# Altium PCB PCB1 腐蚀板.PcbDoc
Units mil, origin at the board's own origin, x right, y up, seen from the top; angles counter-clockwise.
Board outline 7956.72 x 5500 mil, 2 copper layers (Top Layer, Bottom Layer); 108 components, 11 nets, 312 pads, 24 vias.
Unrouted connection lines stored in the file: 4.
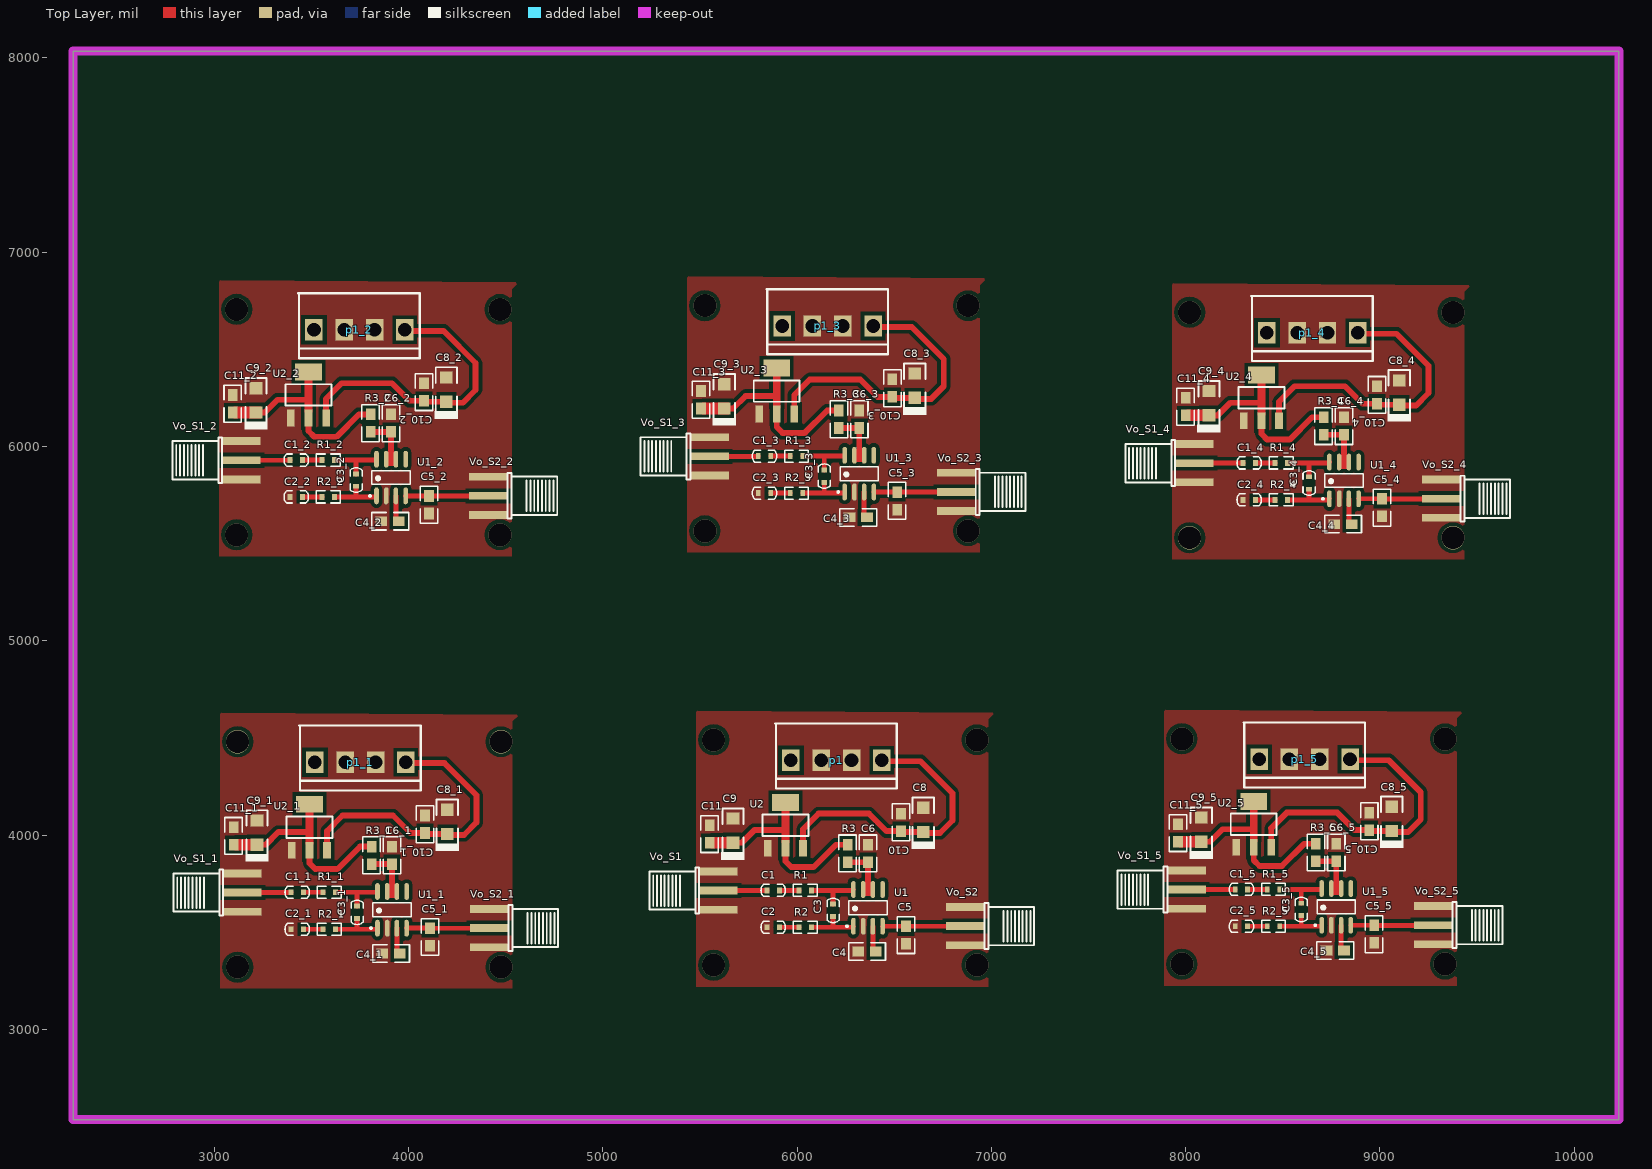
[diagram p0: Top Layer view]
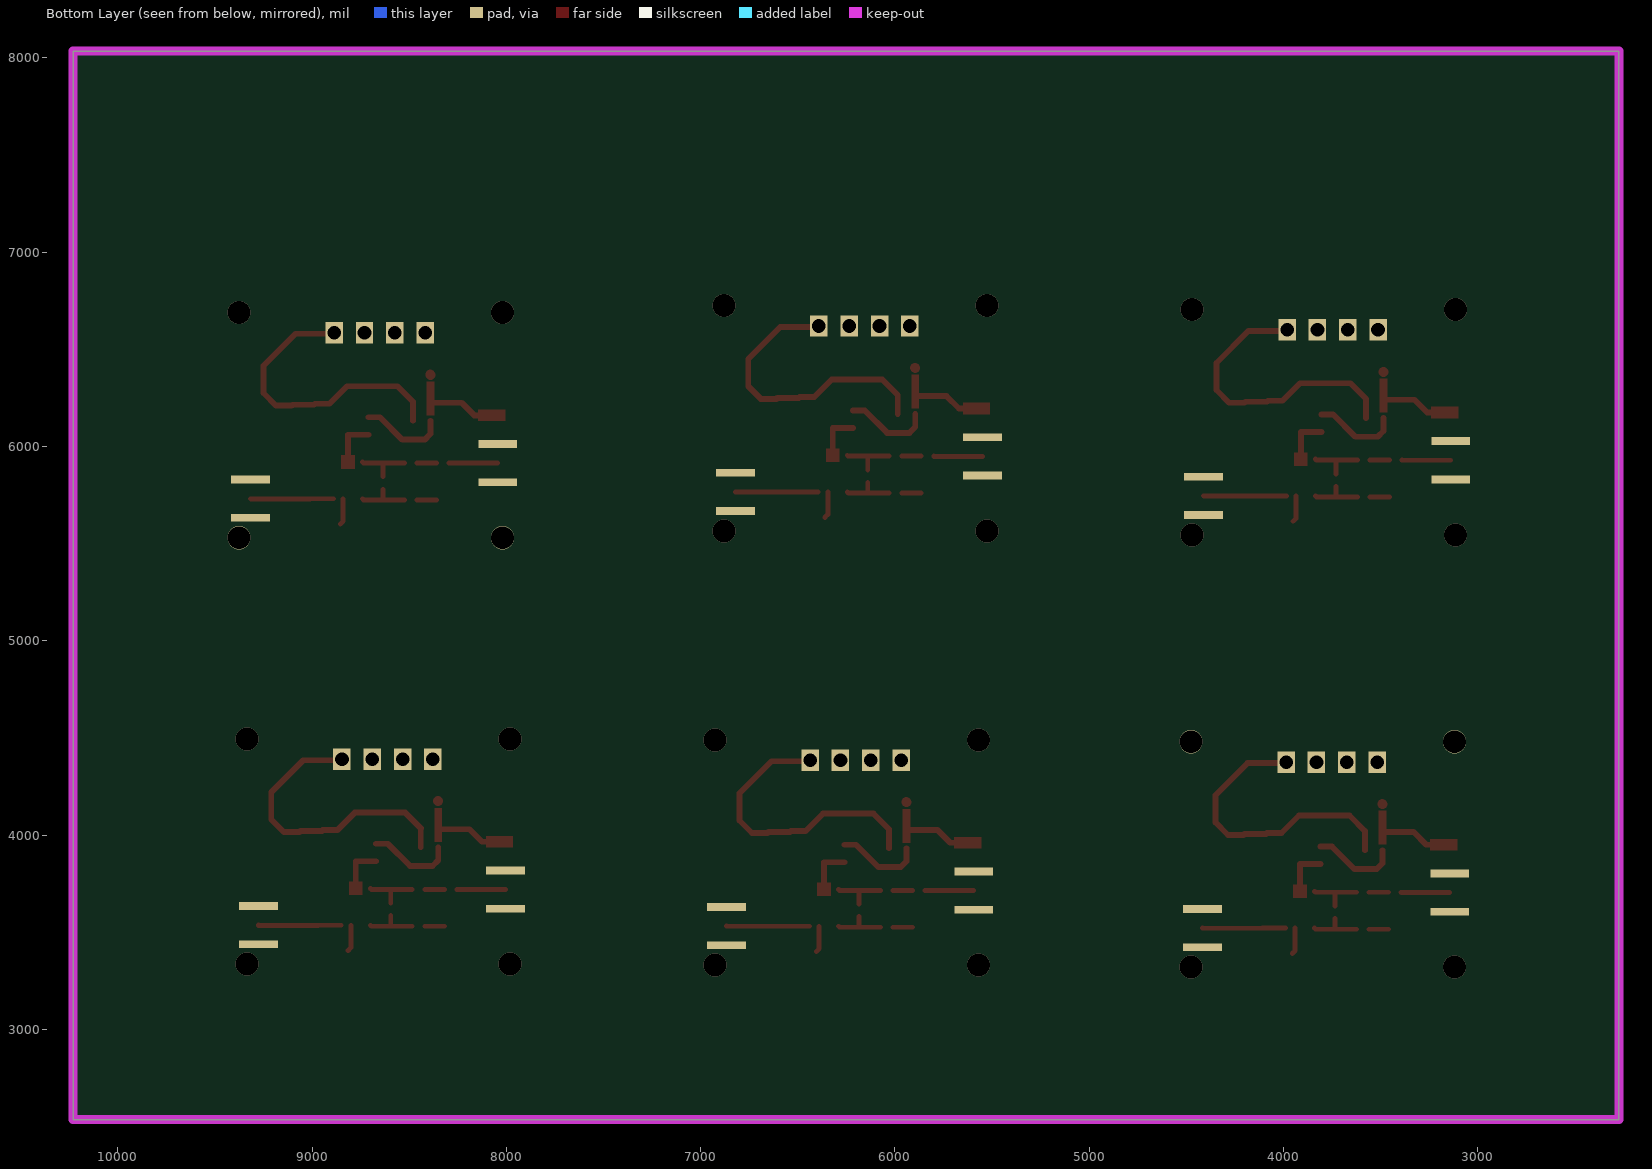
[diagram p1: Bottom Layer view, seen from below]

## Layer stack, top to bottom
Top Solder: solder mask 0.4, Solder Resist, Dk 3.5
Top Layer: signal copper 1.4
Dielectric 1: dielectric 12.6, FR-4, Dk 4.8
Bottom Layer: signal copper 1.4
Bottom Solder: solder mask 0.4, Solder Resist, Dk 3.5

## Board outline
2273.28,2535 10230,2535 10230,8035 2273.28,8035

## Design rules (kind name [scope] priority, off if disabled: settings)
Clearance [All] p1: gap=10 except(20: Arc-Fill Arc-Poly Track-Fill Track-Poly SMDPad-Fill SMDPad-Poly THPad-Fill THPad-Poly Via-Fill Via-Poly Fill-Fill Fill-Poly Poly-Poly)
PlaneConnect [All] p1: planeconnectstyle=Direct reliefexpansion=20 reliefentries=4 reliefconductorwidth=10 reliefairgap=10
PolygonConnect [All] p1: connectstyle=Direct reliefconductorwidth=10 reliefentries=4 polygonreliefangle="90 Angle" airgapwidth=10
RoutingVias [All] p1: holewidth=28 width=50 viastyle="Through Hole" minholewidth=28 minwidth=50 maxholewidth=28 maxwidth=50
SolderMaskExpansion [All] p1: expansion=4
Width [All] p1: maxlimit=100 minlimit=6 preferedwidth=10
29 further rules are at their usual default settings.

## Components (designator, comment, footprint, x,y, rotation, side; value= is the part's Value field where it differs from the comment)
C1 "0.1uf" 0603C 5845,3715 r0 top
C1_1 "0.1uf" 0603C 3395,3705 r0 top (schematic designator C1)
C1_2 "0.1uf" 0603C 3390,5930 r0 top (schematic designator C1)
C1_3 "0.1uf" 0603C 5800,5950 r0 top (schematic designator C1)
C1_4 "0.1uf" 0603C 8295,5915 r0 top (schematic designator C1)
C1_5 "0.1uf" 0603C 8255,3720 r0 top (schematic designator C1)
C2 "0.1uf" 0603C 5845,3525 r0 top
C2_1 "0.1uf" 0603C 3395,3515 r0 top (schematic designator C2)
C2_2 "0.1uf" 0603C 3390,5740 r0 top (schematic designator C2)
C2_3 "0.1uf" 0603C 5800,5760 r0 top (schematic designator C2)
C2_4 "0.1uf" 0603C 8295,5725 r0 top (schematic designator C2)
C2_5 "0.1uf" 0603C 8255,3530 r0 top (schematic designator C2)
C3 "0.1uf" 0603C 6185,3580 r90 top
C3_1 "0.1uf" 0603C 3735,3570 r90 top (schematic designator C3)
C3_2 "0.1uf" 0603C 3730,5795 r90 top (schematic designator C3)
C3_3 "0.1uf" 0603C 6140,5815 r90 top (schematic designator C3)
C3_4 "0.1uf" 0603C 8635,5780 r90 top (schematic designator C3)
C3_5 "0.1uf" 0603C 8595,3585 r90 top (schematic designator C3)
C4 "0.1uf" 0805 6405,3400 r180 top
C4_1 "0.1uf" 0805 3955,3390 r180 top (schematic designator C4)
C4_2 "0.1uf" 0805 3950,5615 r180 top (schematic designator C4)
C4_3 "0.1uf" 0805 6360,5635 r180 top (schematic designator C4)
C4_4 "0.1uf" 0805 8855,5600 r180 top (schematic designator C4)
C4_5 "0.1uf" 0805 8815,3405 r180 top (schematic designator C4)
C5 "0.1uf" 0805 6560,3530 r270 top
C5_1 "0.1uf" 0805 4110,3520 r270 top (schematic designator C5)
C5_2 "0.1uf" 0805 4105,5745 r270 top (schematic designator C5)
C5_3 "0.1uf" 0805 6515,5765 r270 top (schematic designator C5)
C5_4 "0.1uf" 0805 9010,5730 r270 top (schematic designator C5)
C5_5 "0.1uf" 0805 8970,3535 r270 top (schematic designator C5)
C6 "0.1uf" 0805 6365,3860 r90 top
C6_1 "0.1uf" 0805 3915,3850 r90 top (schematic designator C6)
C6_2 "0.1uf" 0805 3910,6075 r90 top (schematic designator C6)
C6_3 "0.1uf" 0805 6320,6095 r90 top (schematic designator C6)
C6_4 "0.1uf" 0805 8815,6060 r90 top (schematic designator C6)
C6_5 "0.1uf" 0805 8775,3865 r90 top (schematic designator C6)
C8 "Cap" 3216C-TYPE_A 6650,4015 r270 top
C8_1 "Cap" 3216C-TYPE_A 4200,4005 r270 top (schematic designator C8)
C8_2 "Cap" 3216C-TYPE_A 4195,6230 r270 top (schematic designator C8)
C8_3 "Cap" 3216C-TYPE_A 6605,6250 r270 top (schematic designator C8)
C8_4 "Cap" 3216C-TYPE_A 9100,6215 r270 top (schematic designator C8)
C8_5 "Cap" 3216C-TYPE_A 9060,4020 r270 top (schematic designator C8)
C9 "Cap" 3216C-TYPE_A 5670,3960 r270 top
C9_1 "Cap" 3216C-TYPE_A 3220,3950 r270 top (schematic designator C9)
C9_2 "Cap" 3216C-TYPE_A 3215,6175 r270 top (schematic designator C9)
C9_3 "Cap" 3216C-TYPE_A 5625,6195 r270 top (schematic designator C9)
C9_4 "Cap" 3216C-TYPE_A 8120,6160 r270 top (schematic designator C9)
C9_5 "Cap" 3216C-TYPE_A 8080,3965 r270 top (schematic designator C9)
C10 "0.1uf" 0805 6535,4110 r270 top
C10_1 "0.1uf" 0805 4085,4100 r270 top (schematic designator C10)
C10_2 "0.1uf" 0805 4080,6325 r270 top (schematic designator C10)
C10_3 "0.1uf" 0805 6490,6345 r270 top (schematic designator C10)
C10_4 "0.1uf" 0805 8985,6310 r270 top (schematic designator C10)
C10_5 "0.1uf" 0805 8945,4115 r270 top (schematic designator C10)
C11 "0.1uf" 0805 5550,4050 r270 top
C11_1 "0.1uf" 0805 3100,4040 r270 top (schematic designator C11)
C11_2 "0.1uf" 0805 3095,6265 r270 top (schematic designator C11)
C11_3 "0.1uf" 0805 5505,6285 r270 top (schematic designator C11)
C11_4 "0.1uf" 0805 8000,6250 r270 top (schematic designator C11)
C11_5 "0.1uf" 0805 7960,4055 r270 top (schematic designator C11)
p1 "VH3.96-4A" VH3.96-4P 6512.68,4239.33 r180 top
p1_1 "VH3.96-4A" VH3.96-4P 4062.68,4229.33 r180 top (schematic designator p1)
p1_2 "VH3.96-4A" VH3.96-4P 4057.68,6454.33 r180 top (schematic designator p1)
p1_3 "VH3.96-4A" VH3.96-4P 6467.68,6474.33 r180 top (schematic designator p1)
p1_4 "VH3.96-4A" VH3.96-4P 8962.68,6439.33 r180 top (schematic designator p1)
p1_5 "VH3.96-4A" VH3.96-4P 8922.68,4244.33 r180 top (schematic designator p1)
R1 "0" 0603R 6042,3715 r0 top
R1_1 "0" 0603R 3592,3705 r0 top (schematic designator R1)
R1_2 "0" 0603R 3587,5930 r0 top (schematic designator R1)
R1_3 "0" 0603R 5997,5950 r0 top (schematic designator R1)
R1_4 "0" 0603R 8492,5915 r0 top (schematic designator R1)
R1_5 "0" 0603R 8452,3720 r0 top (schematic designator R1)
R2 "0" 0603R 6042,3525 r0 top
R2_1 "0" 0603R 3592,3515 r0 top (schematic designator R2)
R2_2 "0" 0603R 3587,5740 r0 top (schematic designator R2)
R2_3 "0" 0603R 5997,5760 r0 top (schematic designator R2)
R2_4 "0" 0603R 8492,5725 r0 top (schematic designator R2)
R2_5 "0" 0603R 8452,3530 r0 top (schematic designator R2)
R3 "4R7" 0805 6260,3950 r270 top
R3_1 "4R7" 0805 3810,3940 r270 top (schematic designator R3)
R3_2 "4R7" 0805 3805,6165 r270 top (schematic designator R3)
R3_3 "4R7" 0805 6215,6185 r270 top (schematic designator R3)
R3_4 "4R7" 0805 8710,6150 r270 top (schematic designator R3)
R3_5 "4R7" 0805 8670,3955 r270 top (schematic designator R3)
U1 "AD8307ARZ" ADI-R-8_N 6365,3625 r90 top
U1_1 "AD8307ARZ" ADI-R-8_N 3915,3615 r90 top (schematic designator U1)
U1_2 "AD8307ARZ" ADI-R-8_N 3910,5840 r90 top (schematic designator U1)
U1_3 "AD8307ARZ" ADI-R-8_N 6320,5860 r90 top (schematic designator U1)
U1_4 "AD8307ARZ" ADI-R-8_N 8815,5825 r90 top (schematic designator U1)
U1_5 "AD8307ARZ" ADI-R-8_N 8775,3630 r90 top (schematic designator U1)
U2 "AMS1117-3.3V" SOT-223 5940,4050 r270 top
U2_1 "AMS1117-3.3V" SOT-223 3490,4040 r270 top (schematic designator U2)
U2_2 "AMS1117-3.3V" SOT-223 3485,6265 r270 top (schematic designator U2)
U2_3 "AMS1117-3.3V" SOT-223 5895,6285 r270 top (schematic designator U2)
U2_4 "AMS1117-3.3V" SOT-223 8390,6250 r270 top (schematic designator U2)
U2_5 "AMS1117-3.3V" SOT-223 8350,4055 r270 top (schematic designator U2)
Vo_S1 "差分输出" SMA-LYING 5535,3710 r0 top
Vo_S1_1 "差分输出" SMA-LYING 3085,3700 r0 top (schematic designator Vo_S1)
Vo_S1_2 "差分输出" SMA-LYING 3080,5925 r0 top (schematic designator Vo_S1)
Vo_S1_3 "差分输出" SMA-LYING 5490,5945 r0 top (schematic designator Vo_S1)
Vo_S1_4 "差分输出" SMA-LYING 7985,5910 r0 top (schematic designator Vo_S1)
Vo_S1_5 "差分输出" SMA-LYING 7945,3715 r0 top (schematic designator Vo_S1)
Vo_S2 "差分输出" SMA-LYING 6925,3535 r180 top
Vo_S2_1 "差分输出" SMA-LYING 4475,3525 r180 top (schematic designator Vo_S2)
Vo_S2_2 "差分输出" SMA-LYING 4470,5750 r180 top (schematic designator Vo_S2)
Vo_S2_3 "差分输出" SMA-LYING 6880,5770 r180 top (schematic designator Vo_S2)
Vo_S2_4 "差分输出" SMA-LYING 9375,5735 r180 top (schematic designator Vo_S2)
Vo_S2_5 "差分输出" SMA-LYING 9335,3540 r180 top (schematic designator Vo_S2)

## Footprints (in the part's own frame and the unit in brackets; to place one, negate y for a bottom-side part, rotate by r counter-clockwise, add the part's x,y. Pads: shape width x height; smd on the part's side, far side on the other; paste and mask are expansions set on the pad)
0603C [mil]
  rect 25x30 smd: 1(0,0) 2(64,0)
  silkscreen extent -31,-31 95,31
0603R [mil]
  rect 25x30 smd: 1(-32,0) 2(32,0)
  silkscreen extent -61,-31 61,31
0805 [mil]
  rect 60x50 smd: 1(0,0) 2(90,0)
  silkscreen extent -50,-45 140,45
3216C-TYPE_A [mm]
  rect 1.6x1.65 smd: 1(0,0) 2(-3.175,0)
  silkscreen extent -4.51,-1.54 2.22,1.52
ADI-R-8_N [mm] "SOIC, 8-Leads, Body 4.9x3.9mm, Pitch 1.27mm, IPC Medium Density"
  oval 2.2x0.6 smd: 1(-2.4,1.905) 2(-2.4,0.635) 3(-2.4,-0.635) 4(-2.4,-1.905) 5(2.4,-1.905) 6(2.4,-0.635) 7(2.4,0.635) 8(2.4,1.905)
  silkscreen extent -2.52,-2.5 0.9,2.88, body extent -2,-2.5 2,2.5, height 1.75
SMA-LYING [mm]
  rect 5.08x1.016 smd: 0(1.5,0.1) 1(1.5,-2.4) 1(1.5,2.6)
  rect 5.08x1.016 smd far side: 1(1.5,-2.4) 1(1.5,2.6)
  silkscreen extent -7.5,-2.9 -1,3.1
SOT-223 [mm]
  rect 2.2x1 smd: 1(3,-2.3) 2(3,0) 3(3,2.3)
  rect 2.2x3.5 smd: 2(-3,0)
  silkscreen extent -1.4,-3 1.4,3, body extent -3.49,-3.24 3.49,3.24, height 1.64
VH3.96-4P [mil]
  rect 90x110 hole 70: 1(76.77,-145.67) 2(232.68,-145.67) 3(388.58,-145.67) 4(544.49,-145.67)
  silkscreen extent 0,-335 625,0

## Part data
C1 C1_1 C1_2 C1_3 C1_4 C1_5 C2 C2_1 C2_2 C2_3 C2_4 C2_5 C3 C3_1 C3_2 C3_3 C3_4 C3_5 C4 C4_1 C4_2 C4_3 C4_4 C4_5 C5 C5_1 C5_2 C5_3 C5_4 C5_5 C6 C6_1 C6_2 C6_3 C6_4 C6_5 C10 C10_1 C10_2 C10_3 C10_4 C10_5 C11 C11_1 C11_2 C11_3 C11_4 C11_5: library part Cap
C8 C8_1 C8_2 C8_3 C8_4 C8_5 C9 C9_1 C9_2 C9_3 C9_4 C9_5: library part "Tantalium Cap"
R1 R1_1 R1_2 R1_3 R1_4 R1_5 R2 R2_1 R2_2 R2_3 R2_4 R2_5 R3 R3_1 R3_2 R3_3 R3_4 R3_5: library part Res
U1 U1_1 U1_2 U1_3 U1_4 U1_5: "Low Cost, DC to 500 MHz, 92 dB Logarithmic Amplifier, 400ns Response Time, R-8, Pb-Free, 98 Tube"
Vo_S1 Vo_S1_1 Vo_S1_2 Vo_S1_3 Vo_S1_4 Vo_S1_5 Vo_S2 Vo_S2_1 Vo_S2_2 Vo_S2_3 Vo_S2_4 Vo_S2_5: library part SMA

## Via types
v1: diameter 118.5, hole 118.11, Top Layer to Bottom Layer, 24 vias

## Nets (pads, with @x,y where several pads share a name; then routed paths per layer and width w, separated by ;. In a path a pad name is that pad's centre, name@x,y a point inside that pad or via, vN(x,y) a via of type N, cw(c..) or ccw(c..) an arc to the next point about the centre after c; other vN are vias at no path point)
5V: C9.1 C11.2 R3.1 U2.2 | length 731.5
  Top Layer w30: C9.1 5715,3960 5780,4025 5925,4025 ; U2.2@5940,3931.89 5940,3865 5970,3835 6085,3835 6200,3950 R3.1
  Top Layer w50: U2.2@5940,4168.11 U2.2@5941.89,4170
GND: C2.1 C4.2 C5.2 C6.2 C8.2 C9.2 C10.1 C11.1 p1.2 p1.3 U1.2 U2.1 Vo_S1.1 Vo_S2.1
NetC1_1: C1.1 Vo_S1.0 | length 251.4
  Top Layer w25: Vo_S1.0 5843.94,3713.94 C1.1
NetC1_2: C1.2 R1.1 | length 101
  Top Layer w25: C1.2 R1.1
NetC2_2: C2.2 R2.1 | length 101
  Top Layer w25: C2.2 R2.1
NetC3_1: C3.1 R2.2 U1.1 | length 275.4
  Top Layer w25: R2.2 6190,3525 ; C3.1 6185,3530 6190,3525 ; U1.1 6284.49,3525 6190,3525
NetC3_2: C3.2 R1.2 U1.8 | length 290.9
  Top Layer w25: R1.2 6190,3715 ; C3.2 6185,3710 6190,3715 ; U1.8 6285.51,3715 6190,3715
NetC4_1: C4.1 U1.3 | length 136.7
  Top Layer w25: U1.3 6390,3415 C4.1
NetC5_1: C5.1 U1.4 Vo_S2.0 | length 426.6
  Top Layer w25: U1.4 6559.49,3530.51 C5.1 6864.88,3530 Vo_S2.0
NetC6_1: C6.1 R3.2 U1.6 U1.7 | length 245
  Top Layer w30: R3.2 C6.1 6365,3720
NetC8_1: C8.1 C10.2 p1.1 U2.3 | length 1544.4
  Top Layer w30: U2.3 6030.55,4029.45 6030,4030 6110,4110 6370,4110 6460,4020 C10.2 6540,4015 C8.1 6655,4010 6735,4010 6800,4075 6800,4215 6635,4380 6455,4380 p1.1@6440,4395
pads on no net: C1_1.1 C1_1.2 C1_2.1 C1_2.2 C1_3.1 C1_3.2 C1_4.1 C1_4.2 C1_5.1 C1_5.2 C2_1.1 C2_1.2 C2_2.1 C2_2.2 C2_3.1 C2_3.2 C2_4.1 C2_4.2 C2_5.1 C2_5.2 C3_1.1 C3_1.2 C3_2.1 C3_2.2 C3_3.1 C3_3.2 C3_4.1 C3_4.2 C3_5.1 C3_5.2 C4_1.1 C4_1.2 C4_2.1 C4_2.2 C4_3.1 C4_3.2 C4_4.1 C4_4.2 C4_5.1 C4_5.2 C5_1.1 C5_1.2 C5_2.1 C5_2.2 C5_3.1 C5_3.2 C5_4.1 C5_4.2 C5_5.1 C5_5.2 C6_1.1 C6_1.2 C6_2.1 C6_2.2 C6_3.1 C6_3.2 C6_4.1 C6_4.2 C6_5.1 C6_5.2 C8_1.1 C8_1.2 C8_2.1 C8_2.2 C8_3.1 C8_3.2 C8_4.1 C8_4.2 C8_5.1 C8_5.2 C9_1.1 C9_1.2 C9_2.1 C9_2.2 C9_3.1 C9_3.2 C9_4.1 C9_4.2 C9_5.1 C9_5.2 C10_1.1 C10_1.2 C10_2.1 C10_2.2 C10_3.1 C10_3.2 C10_4.1 C10_4.2 C10_5.1 C10_5.2 C11_1.1 C11_1.2 C11_2.1 C11_2.2 C11_3.1 C11_3.2 C11_4.1 C11_4.2 C11_5.1 C11_5.2 p1.4 p1_1.1 p1_1.2 p1_1.3 p1_1.4 p1_2.1 p1_2.2 p1_2.3 p1_2.4 p1_3.1 p1_3.2 p1_3.3 p1_3.4 p1_4.1 p1_4.2 p1_4.3 p1_4.4 p1_5.1 p1_5.2 p1_5.3 p1_5.4 R1_1.1 R1_1.2 R1_2.1 R1_2.2 R1_3.1 R1_3.2 R1_4.1 R1_4.2 R1_5.1 R1_5.2 R2_1.1 R2_1.2 R2_2.1 R2_2.2 R2_3.1 R2_3.2 R2_4.1 R2_4.2 R2_5.1 R2_5.2 R3_1.1 R3_1.2 R3_2.1 R3_2.2 R3_3.1 R3_3.2 R3_4.1 R3_4.2 R3_5.1 R3_5.2 U1.5 U1_1.1 U1_1.2 U1_1.3 U1_1.4 U1_1.5 U1_1.6 U1_1.7 U1_1.8 U1_2.1 U1_2.2 U1_2.3 U1_2.4 U1_2.5 U1_2.6 U1_2.7 U1_2.8 U1_3.1 U1_3.2 U1_3.3 U1_3.4 U1_3.5 U1_3.6 U1_3.7 U1_3.8 U1_4.1 U1_4.2 U1_4.3 U1_4.4 U1_4.5 U1_4.6 U1_4.7 U1_4.8 U1_5.1 U1_5.2 U1_5.3 U1_5.4 U1_5.5 U1_5.6 U1_5.7 U1_5.8 U2_1.1 U2_1.2 U2_1.3 U2_2.1 U2_2.2 U2_2.3 U2_3.1 U2_3.2 U2_3.3 U2_4.1 U2_4.2 U2_4.3 U2_5.1 U2_5.2 U2_5.3 Vo_S1_1.0 Vo_S1_1.1 Vo_S1_2.0 Vo_S1_2.1 Vo_S1_3.0 Vo_S1_3.1 Vo_S1_4.0 Vo_S1_4.1 Vo_S1_5.0 Vo_S1_5.1 Vo_S2_1.0 Vo_S2_1.1 Vo_S2_2.0 Vo_S2_2.1 Vo_S2_3.0 Vo_S2_3.1 Vo_S2_4.0 Vo_S2_4.1 Vo_S2_5.0 Vo_S2_5.1
copper on no net: | length 20519.6
  Top Layer w25: 3139.06,5928.94 3388.94,5928.94 3390,5930 ; 3144.06,3703.94 3393.94,3703.94 3395,3705 ; 3454,5740 3555,5740 ; 3454,5930 3555,5930 ; 3459,3515 3560,3515 ; 3459,3705 3560,3705 ; 3619,5740 3735,5740 ; 3619,5930 3735,5930 ; 3624,3515 3740,3515 ; 3624,3705 3740,3705 ; 3730,5795 3730,5745 3735,5740 ; 3730,5859 3730,5925 3735,5930 ; 3735,3570 3735,3520 3740,3515 ; 3735,3634 3735,3700 3740,3705 ; 3835,5745.51 3829.49,5740 3735,5740 ; 3835,5934.49 3830.51,5930 3735,5930 ; 3840,3520.51 3834.49,3515 3740,3515 ; 3840,3709.49 3835.51,3705 3740,3705 ; 3935,5745.51 3935,5630 3950,5615 ; 3940,3520.51 3940,3405 3955,3390 ; 3985,5745.51 4104.49,5745.51 4105,5745 4409.88,5745 4410.94,5746.06 ; 3990,3520.51 4109.49,3520.51 4110,3520 4414.88,3520 4415.94,3521.06 ; 5549.06,5948.94 5798.94,5948.94 5800,5950 ; 5864,5760 5965,5760 ; 5864,5950 5965,5950 ; 6029,5760 6145,5760 ; 6029,5950 6145,5950 ; 6140,5815 6140,5765 6145,5760 ; 6140,5879 6140,5945 6145,5950 ; 6245,5765.51 6239.49,5760 6145,5760 ; 6245,5954.49 6240.51,5950 6145,5950 ; 6345,5765.51 6345,5650 6360,5635 ; 6395,5765.51 6514.49,5765.51 6515,5765 6819.88,5765 6820.94,5766.06 ; 8004.06,3718.94 8253.94,3718.94 8255,3720 ; 8044.06,5913.94 8293.94,5913.94 8295,5915 ; 8319,3530 8420,3530 ; 8319,3720 8420,3720 ; 8359,5725 8460,5725 ; 8359,5915 8460,5915 ; 8484,3530 8600,3530 ; 8484,3720 8600,3720 ; 8524,5725 8640,5725 ; 8524,5915 8640,5915 ; 8595,3585 8595,3535 8600,3530 ; 8595,3649 8595,3715 8600,3720 ; 8635,5780 8635,5730 8640,5725 ; 8635,5844 8635,5910 8640,5915 ; 8700,3535.51 8694.49,3530 8600,3530 ; 8700,3724.49 8695.51,3720 8600,3720 ; 8740,5730.51 8734.49,5725 8640,5725 ; 8740,5919.49 8735.51,5915 8640,5915 ; 8800,3535.51 8800,3420 8815,3405 ; 8840,5730.51 8840,5615 8855,5600 ; 8850,3535.51 8969.49,3535.51 8970,3535 9274.88,3535 9275.94,3536.06 ; 8890,5730.51 9009.49,5730.51 9010,5730 9314.88,5730 9315.94,5731.06
  Top Layer w30: 3215,6175 3260,6175 3325,6240 3470,6240 ; 3220,3950 3265,3950 3330,4015 3475,4015 ; 3485,6146.89 3485,6080 3515,6050 3630,6050 3745,6165 3805,6165 ; 3490,3921.89 3490,3855 3520,3825 3635,3825 3750,3940 3810,3940 ; 3575.55,6146.89 3575.55,6244.45 3575,6245 3655,6325 3915,6325 4005,6235 4080,6235 4085,6230 4195,6230 4200,6225 4280,6225 4345,6290 4345,6430 4180,6595 4000,6595 3985,6610 ; 3580.55,3921.89 3580.55,4019.45 3580,4020 3660,4100 3920,4100 4010,4010 4085,4010 4090,4005 4200,4005 4205,4000 4285,4000 4350,4065 4350,4205 4185,4370 4005,4370 3990,4385 ; 3805,6075 3910,6075 3910,5935 ; 3810,3850 3915,3850 3915,3710 ; 5625,6195 5670,6195 5735,6260 5880,6260 ; 5895,6166.89 5895,6100 5925,6070 6040,6070 6155,6185 6215,6185 ; 5985.55,6166.89 5985.55,6264.45 5985,6265 6065,6345 6325,6345 6415,6255 6490,6255 6495,6250 6605,6250 6610,6245 6690,6245 6755,6310 6755,6450 6590,6615 6410,6615 6395,6630 ; 6215,6095 6320,6095 6320,5955 ; 8080,3965 8125,3965 8190,4030 8335,4030 ; 8120,6160 8165,6160 8230,6225 8375,6225 ; 8350,3936.89 8350,3870 8380,3840 8495,3840 8610,3955 8670,3955 ; 8390,6131.89 8390,6065 8420,6035 8535,6035 8650,6150 8710,6150 ; 8440.55,3936.89 8440.55,4034.45 8440,4035 8520,4115 8780,4115 8870,4025 8945,4025 8950,4020 9060,4020 9065,4015 9145,4015 9210,4080 9210,4220 9045,4385 8865,4385 8850,4400 ; 8480.55,6131.89 8480.55,6229.45 8480,6230 8560,6310 8820,6310 8910,6220 8985,6220 8990,6215 9100,6215 9105,6210 9185,6210 9250,6275 9250,6415 9085,6580 8905,6580 8890,6595 ; 8670,3865 8775,3865 8775,3725 ; 8710,6060 8815,6060 8815,5920
  Top Layer w50: 3485,6383.11 3486.89,6385 ; 3490,4158.11 3491.89,4160 ; 5895,6403.11 5896.89,6405 ; 8350,4173.11 8351.89,4175 ; 8390,6368.11 8391.89,6370
  other v1: 3120,3320 4475,3320 5570,3330 6925,3330 7980,3335 9335,3335 3120,4480 4475,4480 5570,4490 6925,4490 7980,4495 9335,4495 8020,5530 9375,5530 3115,5545 4470,5545 5525,5565 6880,5565 8020,6690 9375,6690 3115,6705 4470,6705 5525,6725 6880,6725

## Polygon pours and split planes (outlines as drawn)
no net on Top Layer "Top Layer-No Net" (solid, pour order 28): 7890,4644.86 7890,3225 9395,3225 9395,4600 9430,4635
no net on Top Layer "Top Layer-No Net" (solid, pour order 26): 7930,6839.86 7930,5420 9435,5420 9435,6795 9470,6830
no net on Top Layer "Top Layer-No Net" (solid, pour order 24): 5435,6874.86 5435,5455 6940,5455 6940,6830 6975,6865
no net on Top Layer "Top Layer-No Net" (solid, pour order 22): 3025,6854.86 3025,5435 4530,5435 4530,6810 4565,6845
no net on Top Layer "Top Layer-No Net" (solid, pour order 20): 3030,4629.86 3030,3210 4535,3210 4535,4585 4570,4620
GND on Top Layer "Top Layer-No Net" (solid, pour order 10): 5480,4639.86 5480,3220 6985,3220 6985,4595 7020,4630

## Keep-outs
Keep-Out Layer:
  the board outline again, w47.24

## Other copper
Top Layer:
  region: 8370,3965 8370,4140 8330,4140 8330,3965
  rectangle: 8740,3690 8810,3760
  rectangle: 7965,3935 8105,3995
  region: 8410,6160 8410,6335 8370,6335 8370,6160
  rectangle: 8780,5885 8850,5955
  rectangle: 8005,6130 8145,6190
  region: 5915,6195 5915,6370 5875,6370 5875,6195
  rectangle: 6285,5920 6355,5990
  rectangle: 5510,6165 5650,6225
  region: 3505,6175 3505,6350 3465,6350 3465,6175
  rectangle: 3875,5900 3945,5970
  rectangle: 3100,6145 3240,6205
  region: 3510,3950 3510,4125 3470,4125 3470,3950
  rectangle: 3880,3675 3950,3745
  rectangle: 3105,3920 3245,3980
  rectangle net 5V: 5555,3930 5695,3990
  rectangle net NetC6_1: 6330,3685 6400,3755
  region net 5V: 5960,3960 5960,4135 5920,4135 5920,3960